# Altium PCB PCB1.PcbDoc
Units mil, origin at the board's own origin, x right, y up, seen from the top; angles counter-clockwise.
Board outline 3000 x 2800 mil, 2 copper layers (Top Layer, Bottom Layer); 17 components, 24 nets, 89 pads, 0 vias.
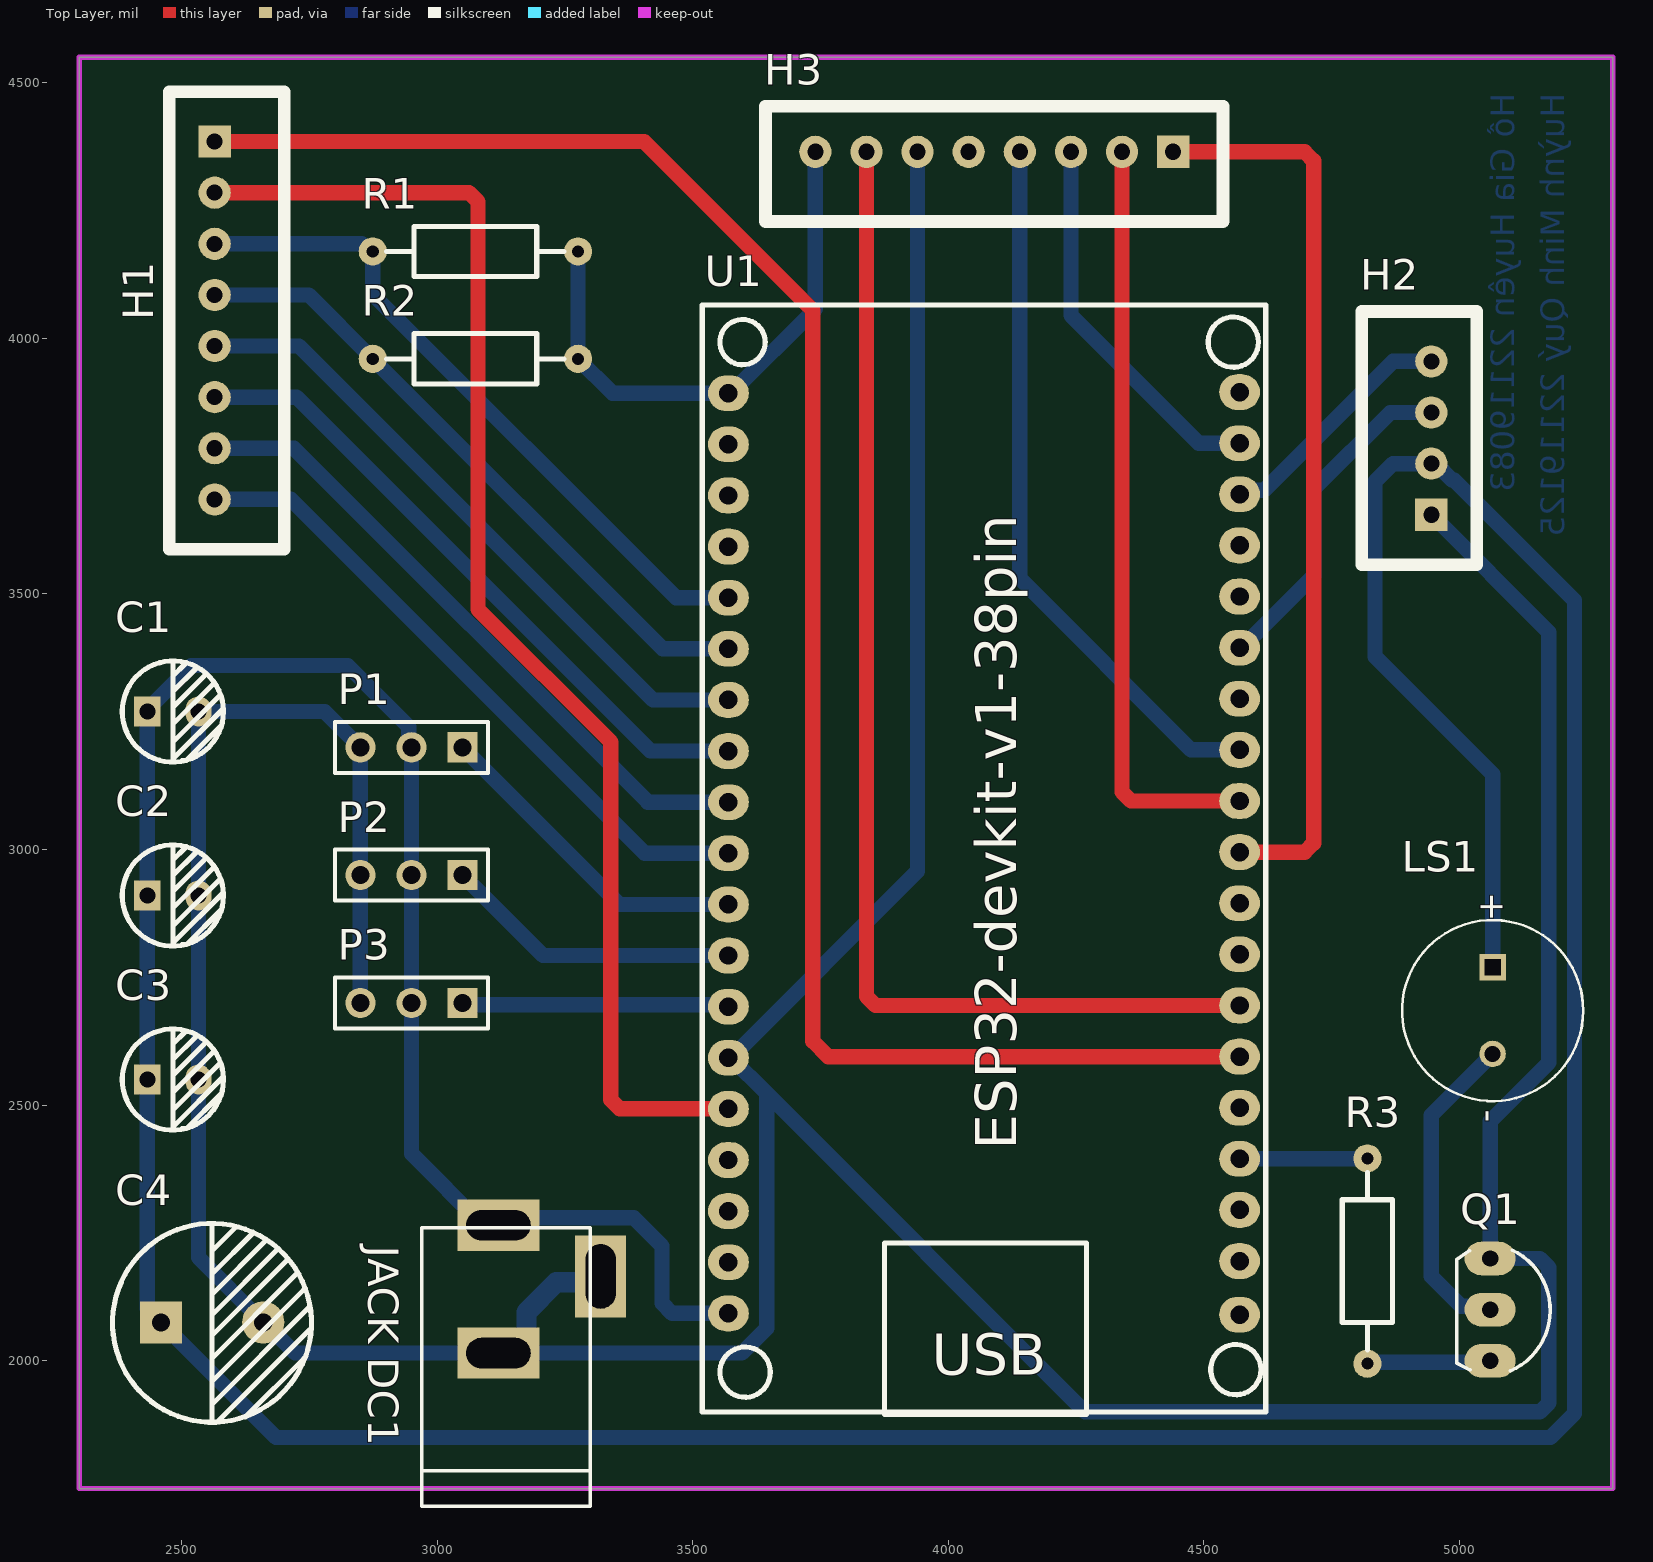
[diagram p0: Top Layer view]
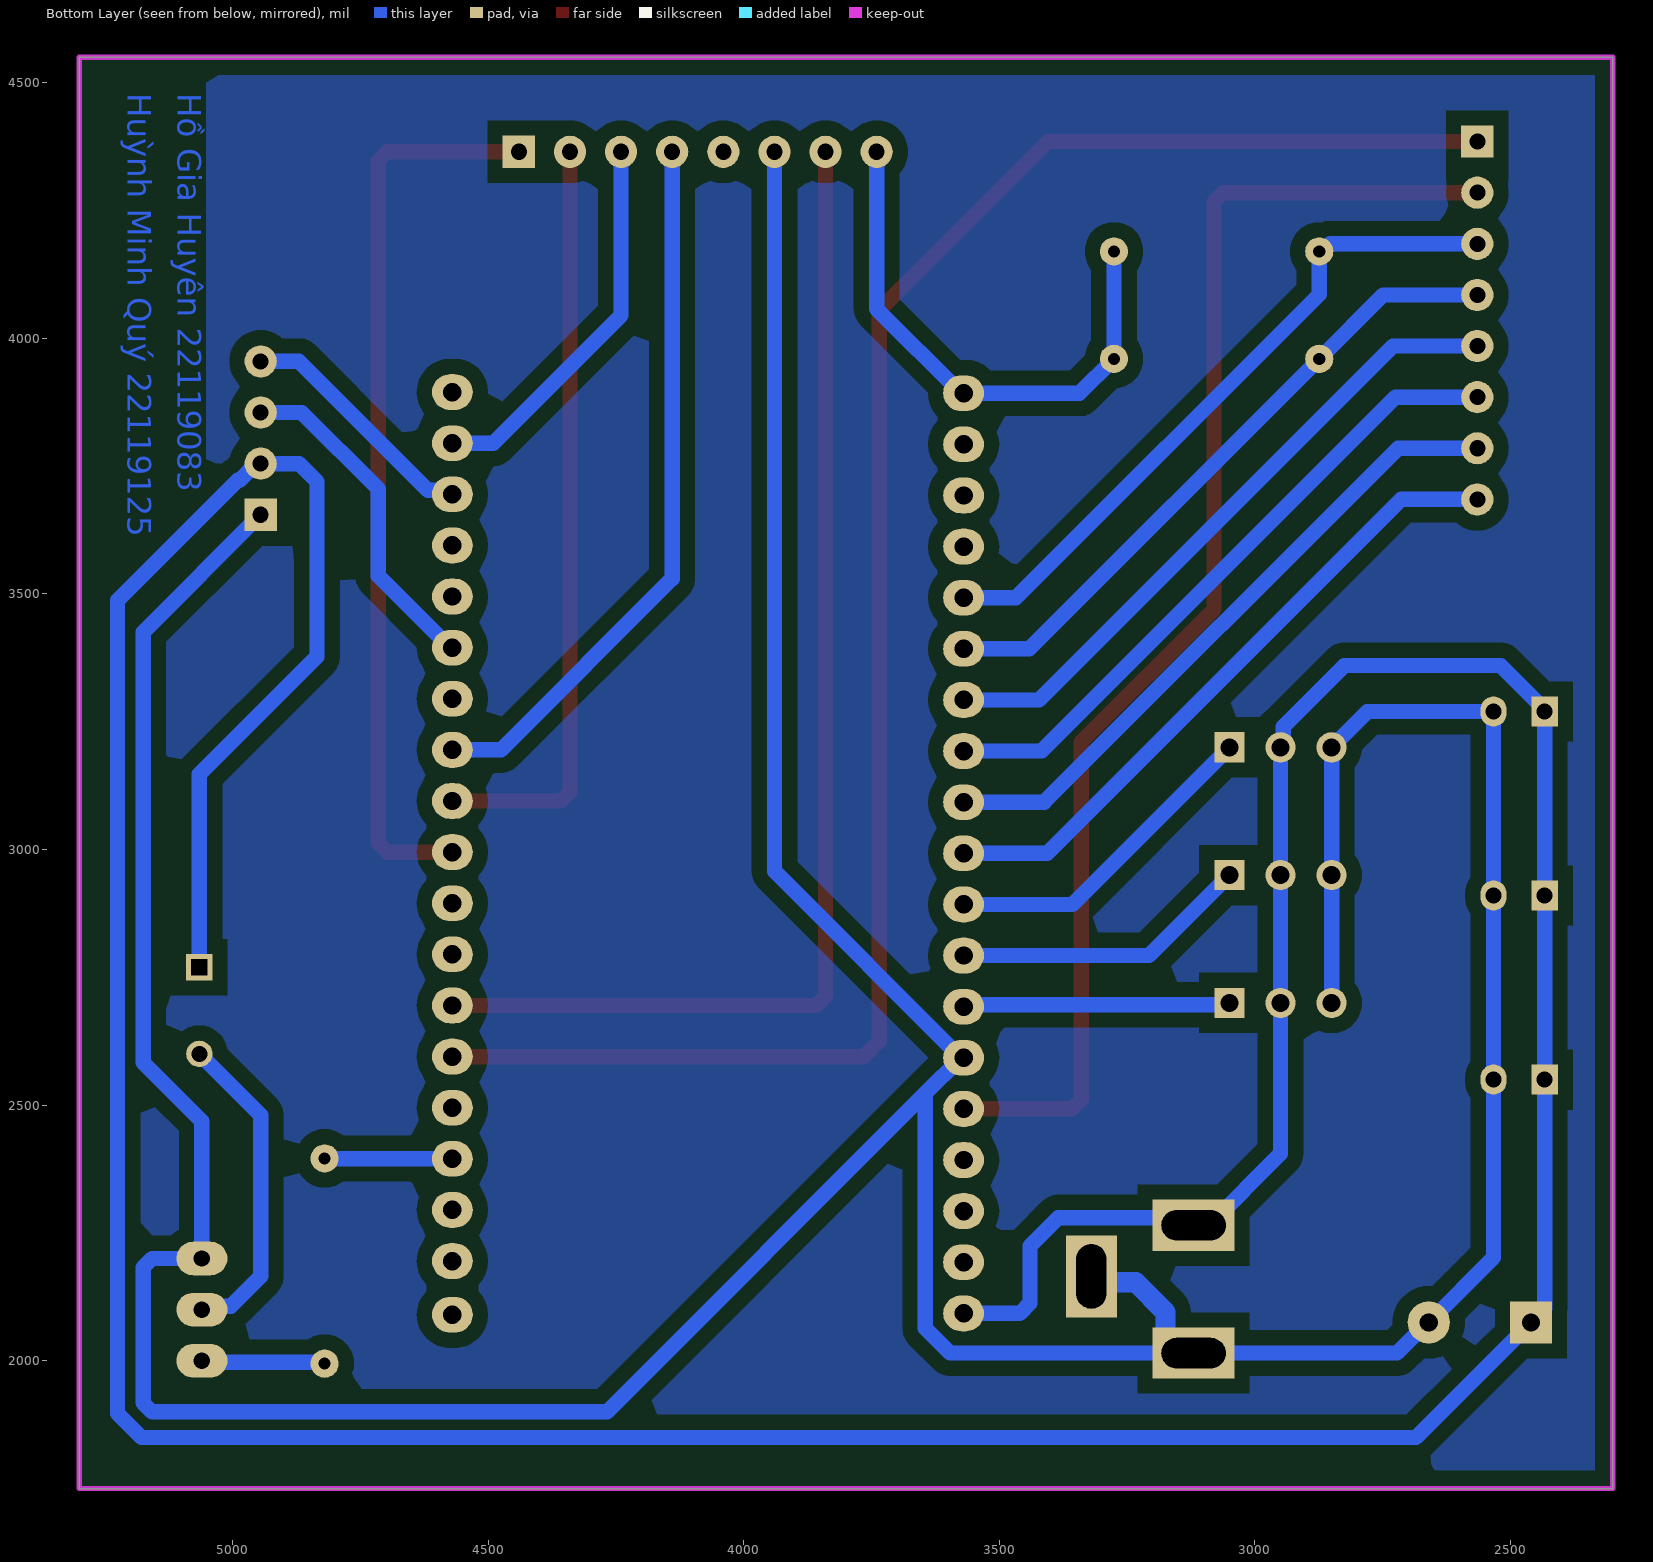
[diagram p1: Bottom Layer view, seen from below]
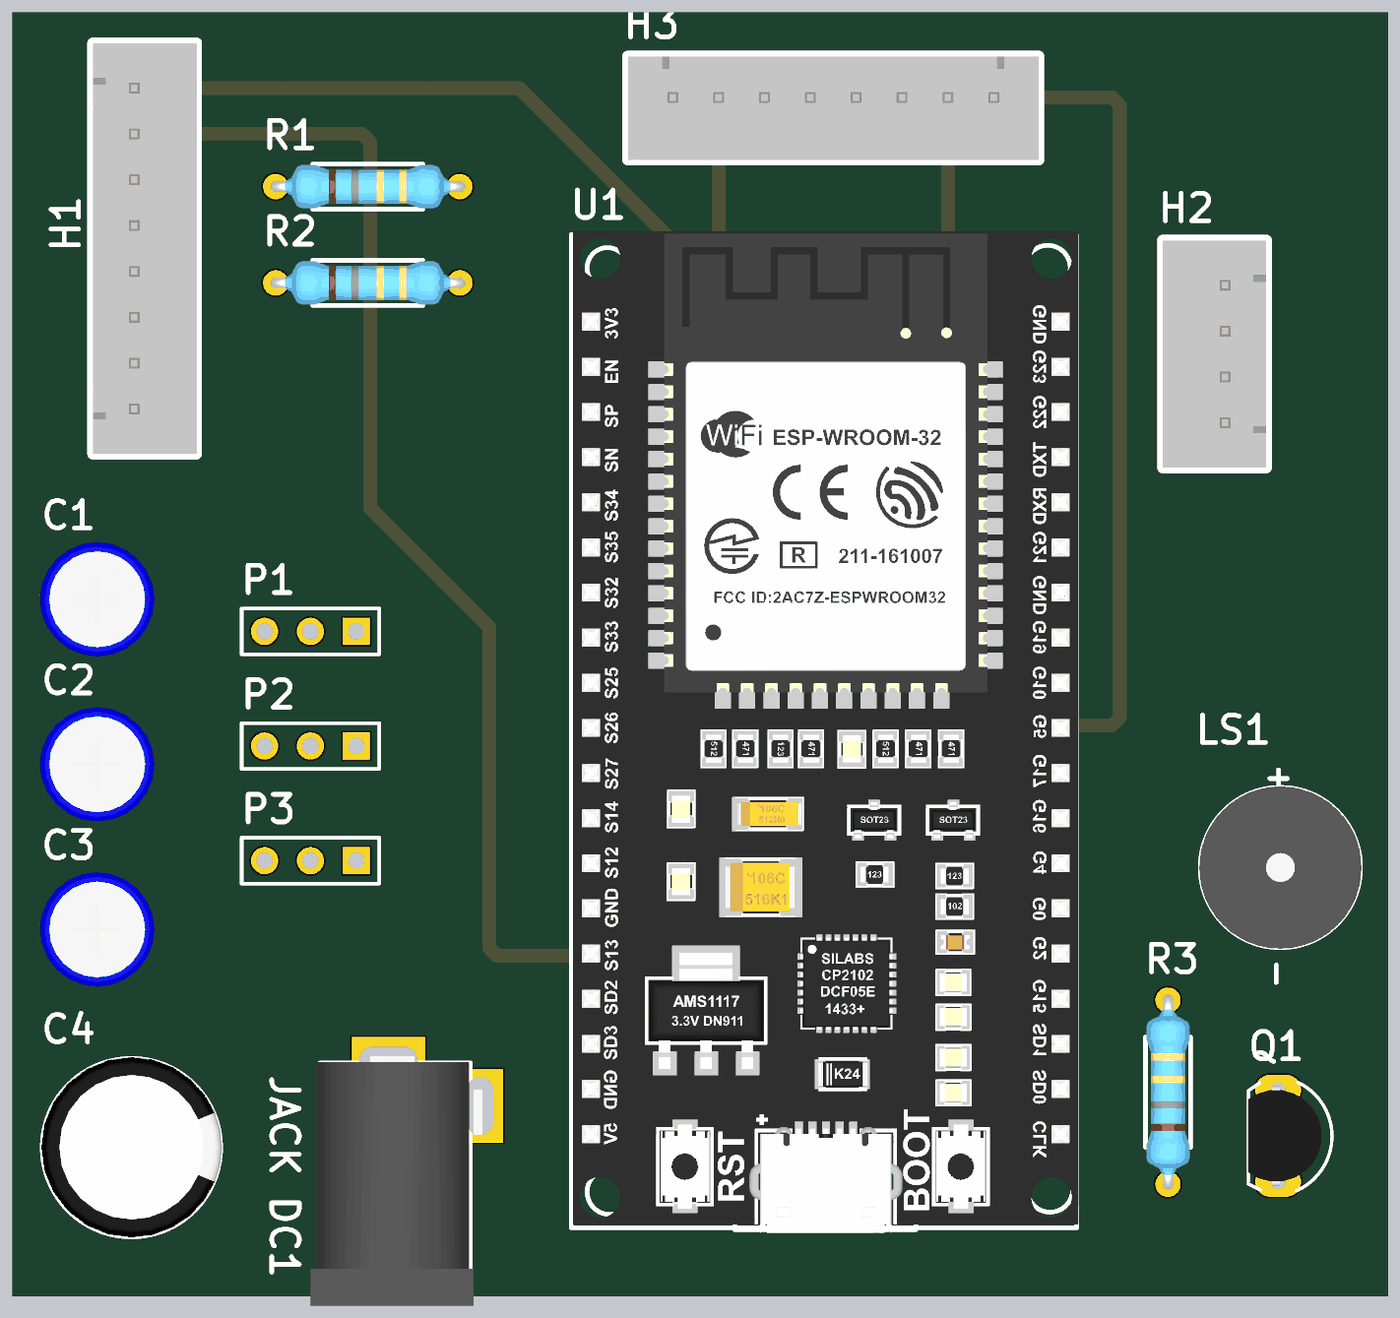
[diagram p2: 3D render of the assembled board from above, using the file's embedded part models]

## Layer stack, top to bottom
Top Solder: solder mask 0.4, Solder Resist, Dk 3.5
Top Layer: signal copper 1.4
Dielectric 1: dielectric 12.6, FR-4, Dk 4.8
Bottom Layer: signal copper 1.4
Bottom Solder: solder mask 0.4, Solder Resist, Dk 3.5

## Board outline
2300,1750 2300,4550 5300,4550 5300,1750

## Design rules (kind name [scope] priority, off if disabled: settings)
Clearance [All] p1: gap=20 ignorepadtopadclearanceinfootprint=FALSE except(30: Arc-Fill Arc-Poly Arc-Region Track-Fill Track-Poly Track-Region SMDPad-Fill SMDPad-Poly SMDPad-Region THPad-Fill THPad-Poly THPad-Region Via-Fill Via-Poly Via-Region Fill-Fill Fill-Poly Fill-Region Poly-Poly Poly-Region Region-Region)
PolygonConnect [All] p1: connectstyle=Relief reliefconductorwidth=10 reliefentries=4 polygonreliefangle="90 Angle" airgapwidth=10
RoutingVias [All] p1: holewidth=28 width=50 viastyle="Through Hole" minholewidth=28 minwidth=50 maxholewidth=28 maxwidth=50
SolderMaskExpansion [All] p1: expansion=4 istentingtop=FALSE
Width [All] p1: maxlimit=150 minlimit=30 preferedwidth=40
30 further rules are at their usual default settings.

## Components (designator, comment, footprint, x,y, rotation, side; value= is the part's Value field where it differs from the comment)
C1 "0.1uF" "tu hoa 5mm" 2483.17,3270 r0 top
C2 "0.1uF" "tu hoa 5mm" 2483.17,2910 r0 top
C3 "0.1uF" "tu hoa 5mm" 2483.17,2550 r0 top
C4 "470uF" "tu hoa 10mm" 2560,2075 r0 top
H1 "Keypad 4x4" XH2.54M-8 2565,4385 r270 top
H2 "LCD 20x4" XH2.54M-4 4945,3655 r90 top
H3 "RFID MFRC522" XH2.54M-8 4440,4365 r180 top
"JACK DC1" "5VDC" "JACK DC 5.5" 3220,2140 r90 top value="Jac DC"
LS1 "Buzzer" Buzzer-9MM 5065,2685 r270 top
P1 "Servo 1" HDR1X3 3050,3200 r180 top
P2 "Servo 2" HDR1X3 3050,2950 r180 top
P3 "Servo 3" HDR1X3 3050,2700 r180 top
Q1 "C1815" TO92 5060,2100 r270 top value=C9014
R1 "1k" "tro vach 1/4w" 3075,4170 r180 top
R2 "1k" "tro vach 1/4w" 3075,3960 r180 top
R3 "3.9k" "tro vach 1/4w" 4820,2195 r270 top
U1 "ESP32-DEVKI-V1.0-PIN38" ESP32-DEVKIT-V1.0-38PIN 4070,2980.08 r0 top

## Footprints (in the part's own frame and the unit in brackets; to place one, negate y for a bottom-side part, rotate by r counter-clockwise, add the part's x,y. Pads: shape width x height; smd on the part's side, far side on the other; paste and mask are expansions set on the pad)
Buzzer-9MM [mm] "9MM"
  rect 1.308x1.308 hole 0.8 square: 1(-2.15,0)
  round 1.308 hole 0.8: 2(2.15,0)
  silkscreen extent -4.5,-4.5 4.5,4.5, body extent -4.5,-4.5 4.5,4.5, height 4.5
ESP32-DEVKIT-V1.0-38PIN [mil] "DEVKIT 38 PIN"
  oval 80x70 hole 36: 1(-500,912.59) 2(-500,812.59) 3(-500,712.59) 4(-500,612.59) 5(-500,512.59) 6(-500,412.59) 7(-500,312.59) 8(-500,212.59) 9(-500,112.59) 10(-500,12.59) 11(-500,-87.41) 12(-500,-187.41) 13(-500,-287.41) 14(-500,-387.41) 15(-500,-487.41) 16(-500,-587.41) 17(-500,-687.41) 18(-500,-787.41) 19(-500,-887.41) 20(500,-890.08) 21(500,-785.08) 22(500,-685.08) 23(500,-585.08) 24(500,-485.08) 25(500,-385.08) 26(500,-285.08) 27(500,-185.08) 28(500,-85.08) 29(500,14.92) 30(500,114.92) 31(500,214.92) 32(500,314.92) 33(500,414.92) 34(500,514.92) 35(500,614.92) 36(500,714.92) 37(500,814.92) 38(500,914.92)
  silkscreen extent -551,-1085 551,1085, body extent -547,-1092 555,1092, height 269
HDR1X3 [mm] "Connector; Header; 3 Position"
  rect 1.5x1.5 hole 0.9: 1(0,0)
  round 1.5 hole 0.9: 2(2.54,0) 3(5.08,0)
  silkscreen extent -1.27,-1.27 6.35,1.27, body extent -1.27,-1.27 6.35,1.27, height 7
"JACK DC 5.5" [mil] "Jac DC input"
  rect 100x160 hole 59.06 slot 125.98 at 90 deg: 1(125,100) 2(-125,100)
  rect 160x100 hole 59.06 slot 125.98 at 0 deg: 3(25,-100)
  silkscreen extent -425,-80 120,250, body extent -410,-105 134,269, height 434
TO92 [mil] "TO-92"
  oval 66x100 hole 32: 1(-100,0) 2(0,0) 3(100,0)
  silkscreen extent -117,-65 120,118, body extent -109,-66 109,95, height 245
"tro vach 1/4w" [mm]
  round 1.4 hole 0.6: 1(-5.1,0) 2(5.1,0)
  silkscreen extent -4.39,-1.25 4.42,1.25, body extent -5.38,-1.2 5.38,1.2, height 2.41
"tu hoa 5mm" [mm]
  rect 1.3x1.5 hole 0.8: 1(-1.27,0)
  oval 1.3x1.5 hole 0.8: 2(1.27,0)
  silkscreen extent -2.51,-2.51 2.51,2.51, body extent -3.12,-3.18 3.23,3.18, height 14.55
"tu hoa 10mm" [mm]
  rect 2.1x2.1 hole 0.9: 1(-2.54,0)
  round 2.1 hole 0.9: 2(2.54,0)
  silkscreen extent -4.95,-4.96 4.93,4.92, body extent -5,-5 4.97,5, height 20.01
XH2.54M-4 [mm]
  rect 1.6x1.6 hole 0.8: 1(0,0)
  round 1.6 hole 0.8: 2(2.54,0) 3(5.08,0) 4(7.62,0)
  silkscreen extent -2.48,-2.26 10.1,3.46, body extent -2.48,-2.26 10.1,3.48, height 6.91
XH2.54M-8 [mm]
  rect 1.6x1.6 hole 0.8: 1(0,0)
  round 1.6 hole 0.8: 2(2.54,0) 3(5.08,0) 4(7.62,0) 5(10.16,0) 6(12.7,0) 7(15.24,0) 8(17.78,0)
  silkscreen extent -2.48,-2.26 20.26,3.46, body extent -2.48,-2.26 20.26,3.48, height 6.91

## Part data
C1 C2 C3: library part "Tu Hoa 0.1uF 50V 5x11", "Cắm", Chung_Loai=Cắm, Don_Vi=Con, Ma_Hang=MH006853, So_Chan=2, Ten_Linh_Kien="Tụ Hóa 0.1uF 50V"
C4: library part "Tu Hoa 470uF 50V 10x17", "Cắm", Chung_Loai=Cắm, Don_Vi=Con, Ma_Hang=MH006866, So_Chan=2, Ten_Linh_Kien="Tụ Hóa 470uF 50V"
H1 H3: library part "Header 8P 2.54 Duc Thang", "Cắm", Chung_Loai=Cắm, Don_Vi=Con, Ma_Hang=MH003366, Ten_Linh_Kien="Header 8P XH2.54-8P Đực Thẳng"
H2: library part "Header 4P 2.54 Duc Thang", "Cắm", Chung_Loai=Cắm, Don_Vi=Con, Ma_Hang=MH001285, Ten_Linh_Kien="Header 4P XH2.54-4P Đực Thẳng"
"JACK DC1": library part "JACK DC 5.5", "JACK DC 5.5"
LS1: Package=None, Availability=Unavailable, MP=CST-951AP, Price=None
P1 P2 P3: library part "Header 3", "Header, 3-Pin", LatestRevisionDate=17-Jul-2002, LatestRevisionNote="Re-released for DXP Platform.", Publisher="Altium Limited"
Q1: library part "Trans C1815 DIP", "NPN transistor"
R1 R2: library part "Tro Vach 1/4W 5% 1k", "Cắm", Chung_Loai=Cắm, Don_Vi=Con, Ma_Hang=MH007390, So_Chan=2, Ten_Linh_Kien="Trở Vạch 1/4w 5% 1k"
R3: library part "Tro Vach 1/4W 5% 3.9k", "Cắm", Chung_Loai=Cắm, Don_Vi=Con, Ma_Hang=MH007307, So_Chan=2, Ten_Linh_Kien="Trở Vạch 1/4w 5% 3.9K"

## Nets (pads, with @x,y where several pads share a name; then routed paths per layer and width w, separated by ;. In a path a pad name is that pad's centre, name@x,y a point inside that pad or via, vN(x,y) a via of type N, cw(c..) or ccw(c..) an arc to the next point about the centre after c; other vN are vias at no path point)
3.3V: H3.8 R1.1 R2.1 U1.1 | length 1077.8
  Bottom Layer w30: R1.1 R2.1 3343.11,3892.67 U1.1 3575,3892.67 3740,4057.67 H3.8
+5: "JACK DC1.1" C1.1 C2.1 C3.1 C4.1 H2.2 LS1.1 P1.2 P2.2 P3.2 U1.19 | length 9500.8
  Bottom Layer w30: U1.19 3459.9,2092.67 3440,2112.57 3440,2224.5 3384.5,2280 3135,2280 3120,2265 3090,2265 2950,2405 P3.2 P2.2 P1.2 2944.8,3205.2 2944.8,3240.2 2825,3360 2519.23,3360 2433.17,3273.94 C1.1 C2.1 C3.1 2433.17,2101.83 C4.1 2685,1850 5178.14,1850 5225,1896.86 5225,3487.49 4990.28,3722.21 4986.72,3722.21 4953.93,3755 H2.2 4870,3755 4835,3720 4835,3377.45 5065,3147.45 LS1.1
C1: H1.5 U1.7 | length 1291.8
  Bottom Layer w30: H1.5 2730,3985 3422.33,3292.67 U1.7
C2: H1.6 U1.8 | length 1291.8
  Bottom Layer w30: H1.6 2725,3885 3417.33,3192.67 U1.8
C3: H1.7 U1.9 | length 1291.8
  Bottom Layer w30: H1.7 2720,3785 3412.33,3092.67 U1.9
C4: H1.8 U1.10 | length 1291.8
  Bottom Layer w30: H1.8 2714.06,3685 3406.39,2992.67 U1.10
GND: "JACK DC1.2" "JACK DC1.3" C1.2 C2.2 C3.2 C4.2 H2.1 H3.6 P1.3 P2.3 P3.3 Q1.1 U1.14 | length 9686.5
  Bottom Layer w30: P3.3 P2.3 P1.3 2780,3270 C1.2 C2.2 C3.2 2533.17,2201.83 C4.2 2662.1,2075 2722.1,2015 3120,2015 3596.32,2015 3645,2063.68 3645,2522.67 ; U1.14@3565,2592.67 U1.14 U1.14@3575,2592.67 ; H3.6 3940,2957.67 U1.14@3575,2592.67 ; H2.1 5175,3425 5175,2583.44 5060,2468.44 Q1.1 5157.43,2200 5175,2182.43 5175,1917.57 5157.43,1900 4267.67,1900 3645,2522.67 ; U1.14@3575,2592.67 3645,2522.67
  Bottom Layer w40: 3120,2015 3144.93,2015 3174.93,2045 3174.93,2094.93 3233.43,2153.43 3308.44,2153.43 3320,2165
MISO: H3.4 U1.31 | length 1403.8
  Bottom Layer w30: H3.4 4140,3530 4475,3195 U1.31
MOSI: H3.3 U1.37 | length 753.6
  Bottom Layer w30: H3.3 4240,4045 4490,3795 U1.37
NetLS1_2: LS1.2 Q1.2 | length 627
  Bottom Layer w30: Q1.2 5053.11,2106.89 5003.11,2106.89 4945,2165 4945,2480.35 LS1.2
NetQ1_3: Q1.3 R3.2 | length 242.4
  Bottom Layer w30: R3.2 4822.89,1997.11 5057.11,1997.11 Q1.3
NetR3_1: R3.1 U1.23 | length 250.3
  Bottom Layer w30: U1.23 4570.39,2395.39 4819.61,2395.39 R3.1
R1: H1.1 U1.25 | length 3584.1
  Top Layer w30: H1.1 3405,4385 3735,4055 3735,2625 3765,2595 U1.25
R2: H1.2 U1.15 | length 2624.4
  Top Layer w30: H1.2 3062.43,4285 3080,4267.43 3080,3470 3340,3210 3340,2510.25 3357.57,2492.67 U1.15
R3: H1.3 R1.2 U1.5 | length 1341.1
  Bottom Layer w30: H1.3 2852.42,4185 2867.42,4170 R1.2 2874.21,4085.79 3467.33,3492.67 U1.5
R4: H1.4 R2.2 U1.6 | length 1291.8
  Bottom Layer w30: H1.4 2749.21,4085 R2.2 3441.54,3392.67 U1.6
RST: H3.7 U1.26 | length 2389.7
  Top Layer w30: H3.7 3840,2712.57 3857.57,2695 U1.26
SCK: H3.2 U1.30 | length 1489.7
  Top Layer w30: H3.2 4340,3112.57 4357.57,3095 U1.30
SCL: H2.4 U1.36 | length 482.7
  Bottom Layer w30: U1.36 4577.65,3702.65 4617.65,3702.65 4870,3955 H2.4
SDA: H2.3 U1.33 | length 665.1
  Bottom Layer w30: U1.33 4575,3395 4715,3535 4715,3705 4865,3855 H2.3
SS: H3.1 U1.29 | length 1769.4
  Top Layer w30: H3.1 4697.43,4365 4715,4347.43 4715,3012.57 4697.43,2995 U1.29
SV1: P1.1 U1.11 | length 647.3
  Bottom Layer w30: P1.1 3357.33,2892.67 U1.11
SV2: P2.1 U1.12 | length 585.2
  Bottom Layer w30: P2.1 3207.33,2792.67 U1.12
SV3: P3.1 U1.13 | length 523
  Bottom Layer w30: P3.1 3053.66,2696.34 3566.34,2696.34 U1.13
pads on no net: H3.5 U1.2 U1.3 U1.4 U1.16 U1.17 U1.18 U1.20 U1.21 U1.22 U1.24 U1.27 U1.28 U1.32 U1.34 U1.35 U1.38
copper on no net: | length 5
  Bottom Layer w30: 4570,3895 4575,3895

## Polygon pours and split planes (outlines as drawn)
no net on Bottom Layer "NONET_L02_P001" (solid, pour order 1): 2300,4550 5300,4550 5300,1750 2300,1750

## Keep-outs
Keep-Out Layer:
  the board outline again, w10

## Other copper
Bottom Layer:
  text "Hồ Gia Huyên 22119083" at 5122.78,4480 h80 r90
  text "Huỳnh Minh Quý 22119125" at 5220.71,4480 h80 r90

## Text inside footprints (layer, text, board x,y; h text height)
LS1: Top Overlay "-" at 5036.31,2491.09 h50.14 r270; Top Overlay "+" at 5041.32,2916.69 h50.13 r270
U1: Top Overlay "ESP32-devkit-v1-38pin" at 4132.64,2412.67 h80 r90; Top Overlay "USB" at 3967.64,1972.67 h80